# Altium PCB 2015PCB新.PcbDoc
Units mil, origin at the board's own origin, x right, y up, seen from the top; angles counter-clockwise.
Board outline 3610.89 x 3006.48 mil, 2 copper layers (Top Layer, Bottom Layer); 68 components, 37 nets, 203 pads, 79 vias.
Unrouted connection lines stored in the file: 1.
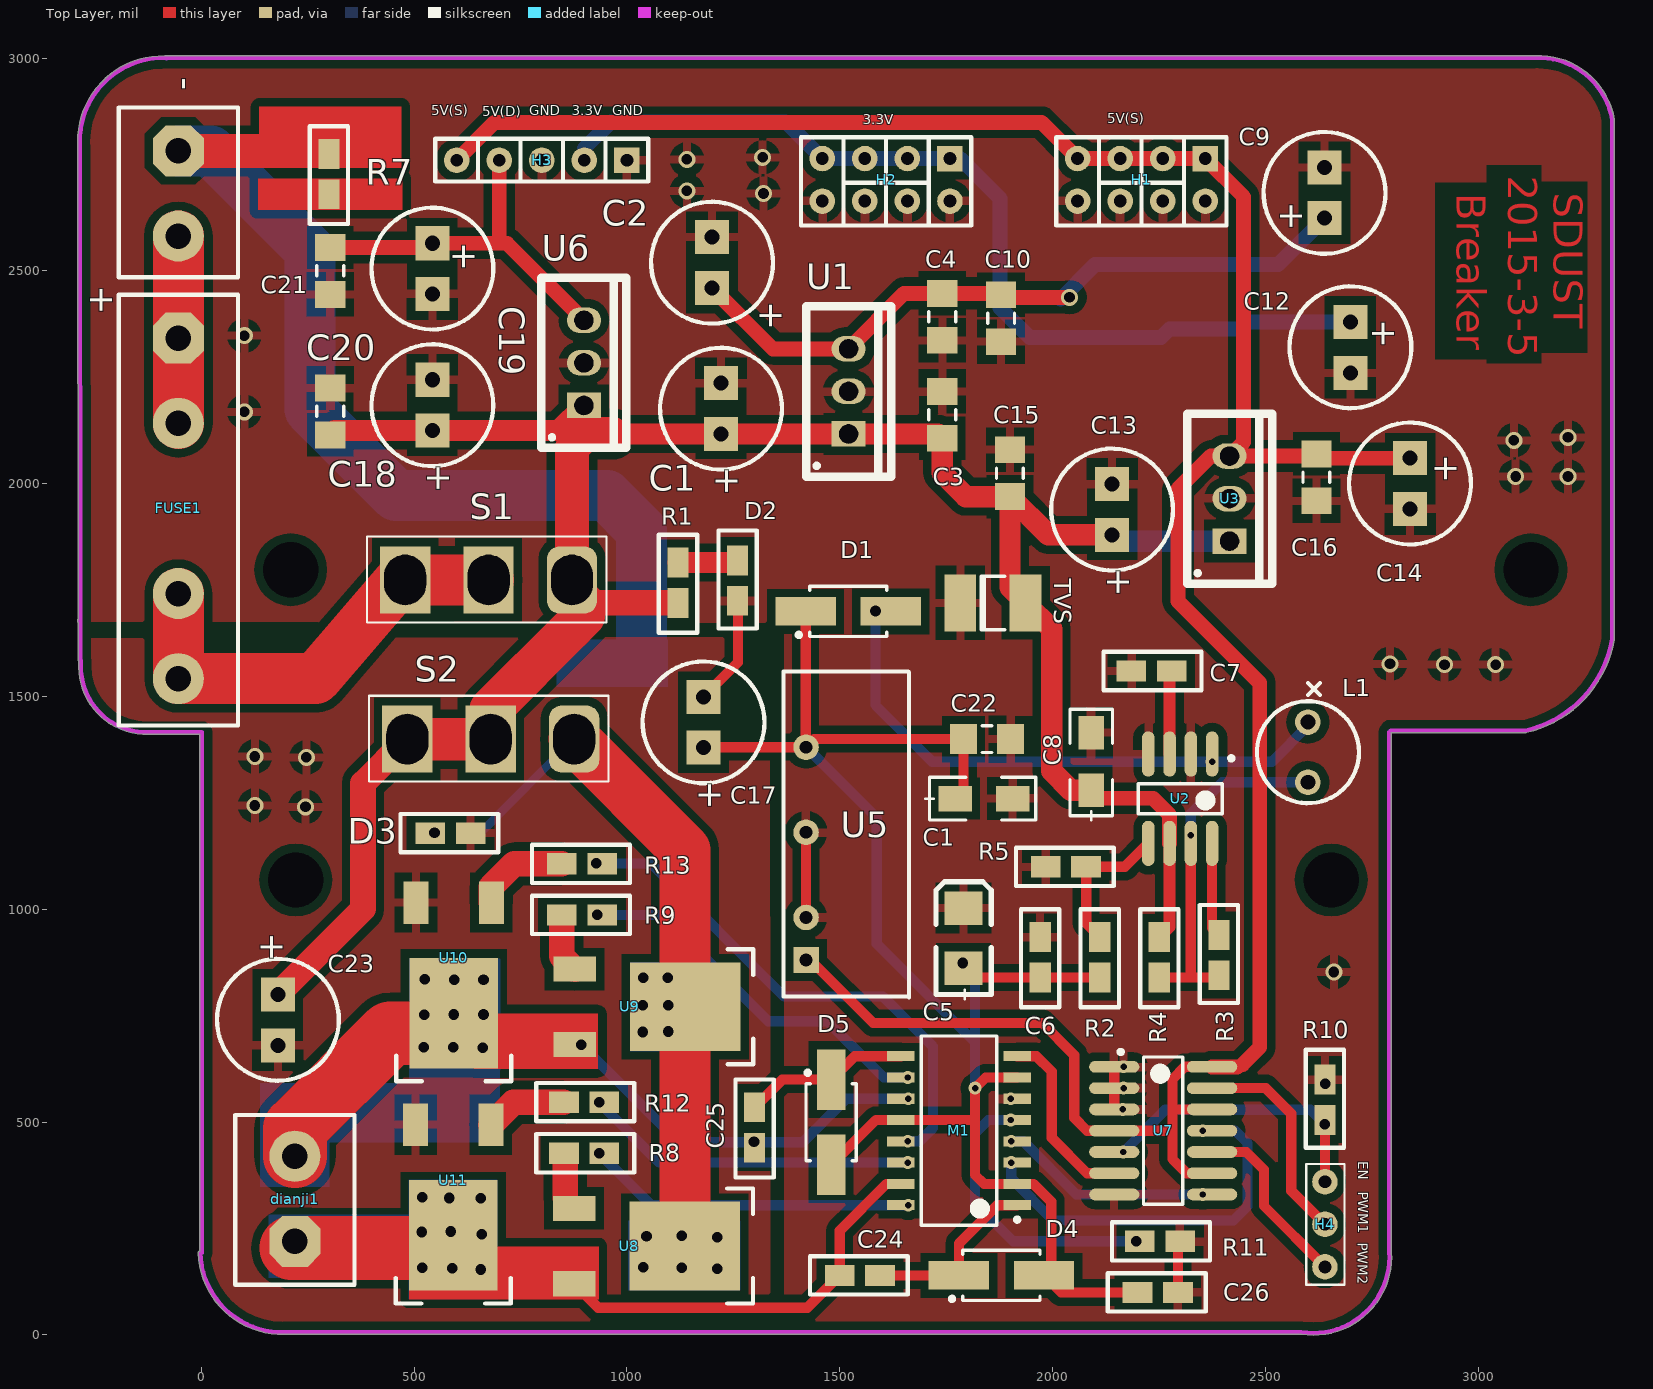
[diagram p0: Top Layer view]
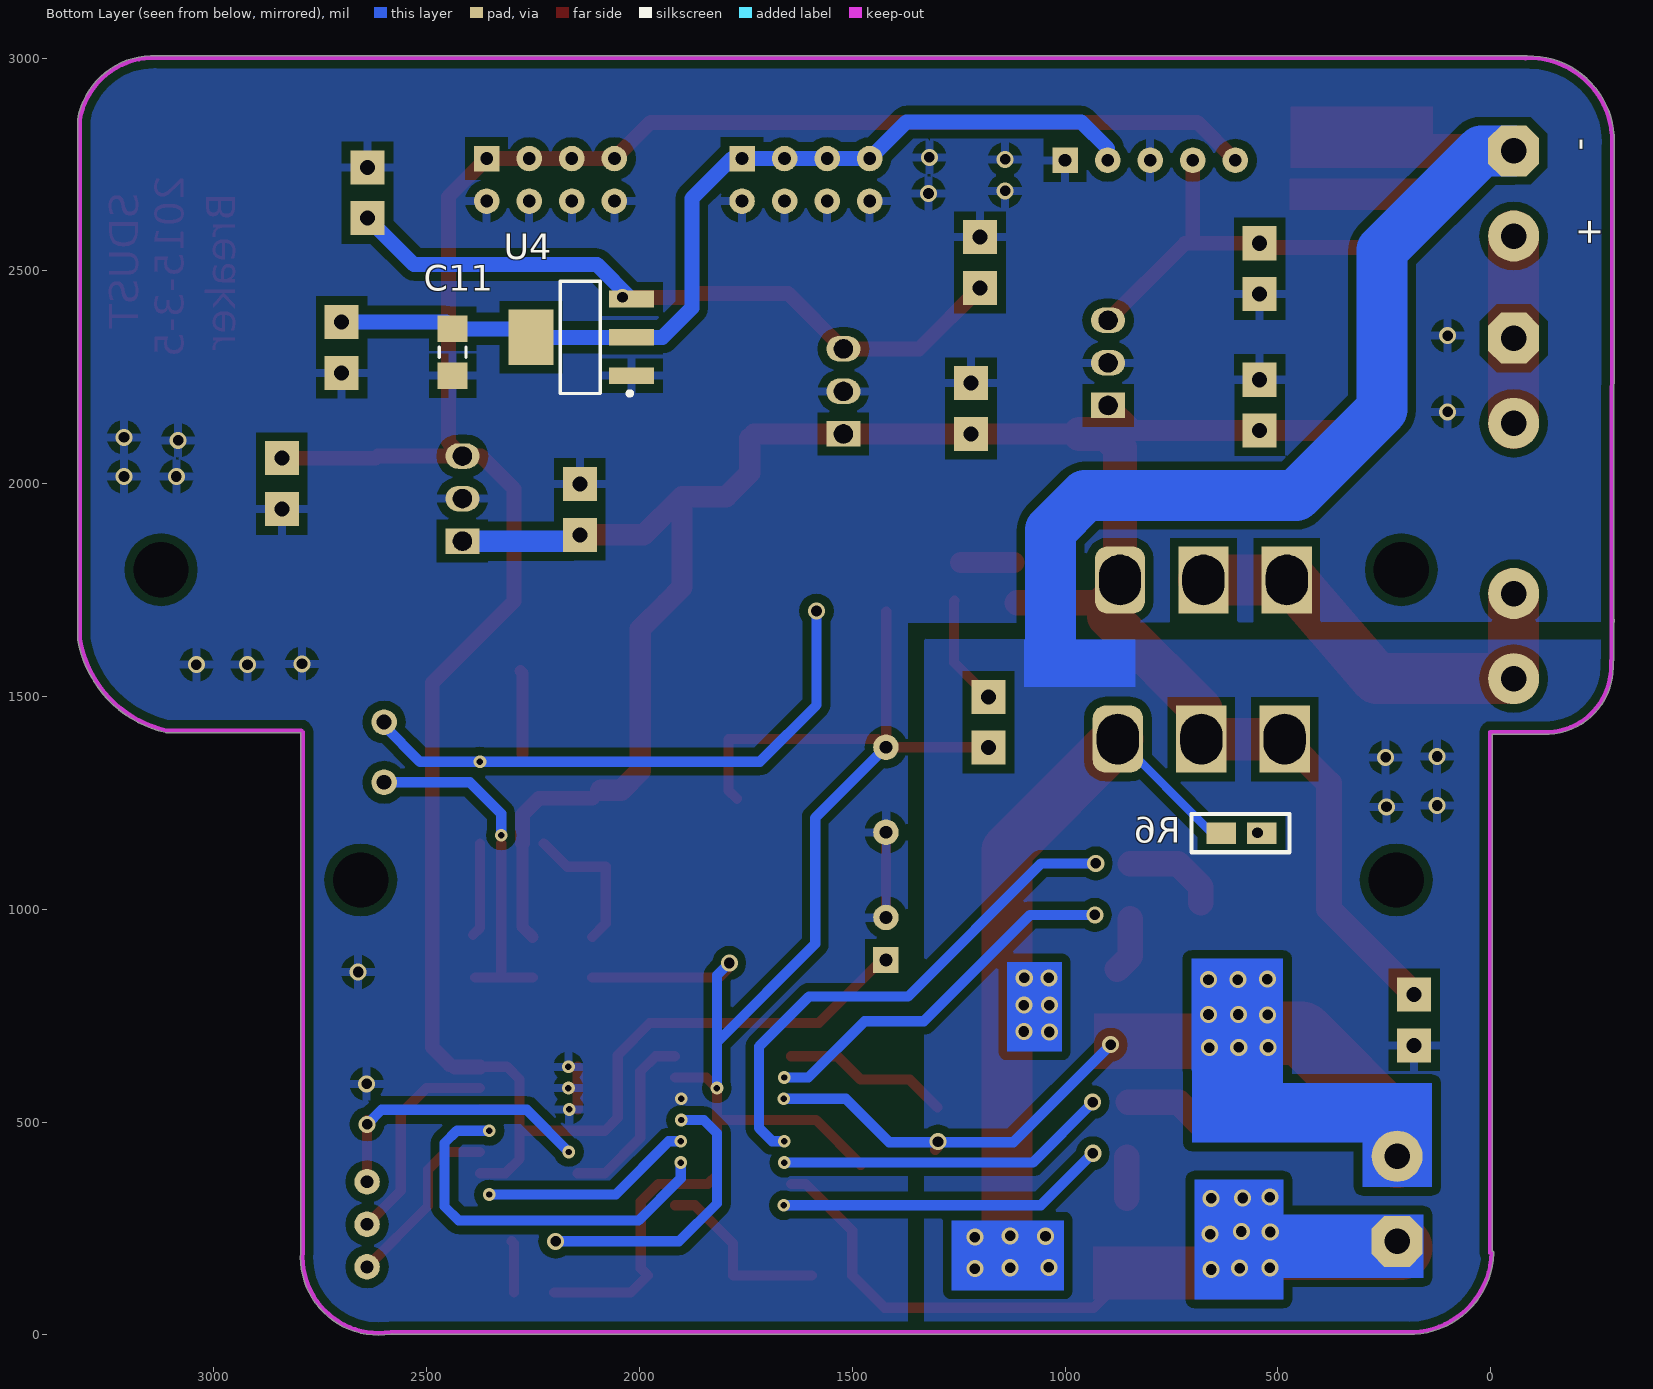
[diagram p1: Bottom Layer view, seen from below]

## Layer stack, top to bottom
Top Layer: signal copper 1.4
Dielectric: dielectric 12.6, FR-4, Dk 4.8
Bottom Layer: signal copper 1.4

## Board outline
-7.61,192.23 cw(c-2.6,192.43) -4.02,197.24 -4.02,1411.99 -133.79,1411.99 cw(c-136.63,1416.12) -136.91,1411.11 cw(c-128.04,1570.81) -287.54,1582.71 cw(c-283.67,1585.9) -288.69,1585.9 -288.69,1673.92 -289.22,1674.45 cw(c-285.67,1678) -288.69,1682 -289.68,2787.16 cw(c-90.06,2804.78) -85.84,3005.14 cw(c-83,3001) -83,3006.02 3133.9,3006.02 cw(c3141.03,2824.27) 3320.14,2855.88 cw(c3315.2,2855.01) 3320.22,2855.01 cw(c3315.2,2855.01) 3320.22,2854.92 3320.22,2855.01 3320.22,2854.92 3319.41,1634.64 cw(c3314.39,1634.58) 3319.41,1634.58 cw(c3314.39,1634.58) 3319.34,1633.74 cw(c3052.9,1679) 3113.12,1415.54 cw(c3112,1420.43) 3112,1415.41 2796.01,1415.41 2796.01,197.19 cw(c2612.54,183.51) 2796.52,183.51 cw(c2612.54,183.51) 2583.85,1.78 cw(c2584.63,6.74) 2581.87,2.55 cw(c2580.08,7.23) 2580.08,2.22 210.73,2.22 cw(c191,200)

## Design rules (kind name [scope] priority, off if disabled: settings)
Clearance Clearance_1 [InPoly] p1: gap=20
Clearance [All] p2: gap=12
ComponentClearance [All] p1: gap=8 collisioncheckmode=3 verticalgap=8 showdistances=FALSE
PolygonConnect [All] p1: connectstyle=Relief reliefconductorwidth=20 reliefentries=4 polygonreliefangle="90 Angle"
RoutingVias [All] p1: holewidth=25 width=40 viastyle="Through Hole" minholewidth=15 minwidth=25 maxholewidth=25 maxwidth=50
SilkscreenOverComponentPads [All] p1: minsilkscreentomaskgap=5
SolderMaskExpansion [All] p1: expansion=4
TestPointUsage [All] p1: valid=0 allowmultiple=FALSE
Testpoint [All] p1: side=15 testpointundercomponent=TRUE minsize=40 maxsize=100 preferedsize=60 minholesize=0 maxholesize=40 preferedholesize=32 testpointgrid=1 style=1023 order=0-112345678
Width [All] p1: maxlimit=1000 minlimit=8 preferedwidth=24
22 further rules are at their usual default settings.

## Components (designator, comment, footprint, x,y, rotation, side; value= is the part's Value field where it differs from the comment)
+ "7.2V电池" PCBComponent_1#1 -54,2782 r0 top (schematic designator BATERY1)
C1 "Cap Pol1_1" PCBComponent_1#2 1221,2117 r180 top
C1 "Comment" 1206 1771,1260 r0 top
C2 "Cap Pol1_1" PCBComponent_1#2 1200,2460 r180 top
C3 "Cap" PCBComponent_1#3 1741,2217 r0 top
C4 "Cap" PCBComponent_1#3 1741,2337 r180 top
C5 "22uF_3528" 3528_B 1791,860 r90 top
C6 "0.1uF" 0805 1971,840 r90 top
C7 "470pF" 0805 2280,1560 r180 top
C8 "10uf" 1206 2091,1280 r90 top
C9 "Cap Pol1_1" PCBComponent_1#2 2639,2624 r180 top
C10 "Cap" PCBComponent_1#3 1879,2444 r0 top
C11 "Cap" PCBComponent_1#3 2439,2364 r180 bottom
C12 "Cap Pol1_1" PCBComponent_1#2 2700,2380 r0 top
C13 "Cap Pol1_1" PCBComponent_1#2 2140,1880 r180 top
C14 "Cap Pol1_1" PCBComponent_1#2 2840,2060 r0 top
C15 "Cap" PCBComponent_1#3 1900,2080 r0 top
C16 "Cap" PCBComponent_1#3 2620,1960 r180 top
C17 "Cap Pol1_1" PCBComponent_1#2 1180,1380 r180 top
C18 "Cap Pol1_1" PCBComponent_1#2 543,2125 r180 top
C19 "Cap Pol1_1" PCBComponent_1#2 543,2565 r0 top
C20 "Cap" PCBComponent_1#3 303,2225 r0 top
C21 "Cap" PCBComponent_1#3 303,2445 r180 top
C22 "Cap" PCBComponent_1#3 1791,1400 r90 top
C23 "Cap Pol1_1" PCBComponent_1#2 180,800 r0 top
C24 "4.7uF" 0805 1500,140 r0 top
C25 "4.7uF" 0805 1300,440 r90 top
C26 "0.1uF" 0805 2200,100 r0 top
D1 "1N5819" SS14_SMA 1520,1700 r180 top
D2 "LED_0805" 0805 1260,1820 r270 top
D3 "LED_0805" 0805 538,1179 r0 top
D4 "1N5819" SS14_SMA 1880,140 r180 top
D5 "1N5819" SS14_SMA 1480,500 r90 top
dianji1 "dianji" PCBComponent_1#1 220,220 r180 top
FUSE1 "Header 2X2" PCBComponent_1#4 -54,2342 r0 top
H1 "HEADER4X2" HEADER4X2 2359,2764 r180 top
H2 "HEADER4X2" HEADER4X2 1759,2764 r180 top
H3 "HEADER" HEADER5 1000,2760 r180 top
H4 "HEADER" 干簧管 2640,160 r90 top
L1 "Inductor" PCBComponent_1#5 2600,1440 r270 top
M1 "HIP4082" SO-16 1780,480 r90 top
R1 "RES" 0805 1120,1720 r90 top
R2 "10K" 0805 2111,840 r90 top
R3 "180" 0805 2391,940 r270 top
R4 "0.22" 0805 2251,840 r90 top
R5 "1K" 0805 1984,1100 r0 top
R6 "RES" 0805 633,1179 r180 bottom
R7 "RES" 0805 300,2680 r90 top
R8 "10" 0805 947,427 r180 top
R9 "10" 0805 847,987 r0 top
R10 "10K" 0805 2640,600 r270 top
R11 "10" 0805 2300,220 r180 top
R12 "10" 0805 947,547 r180 top
R13 "10" 0805 847,1107 r0 top
S1 "单刀双掷开关" 三脚开关 675,1774 r0 top
S2 "三脚开关" 三脚开关 680,1400 r0 top
TVS "TVS" 1812 1860,1720 r0 top (schematic designator erjiguan1)
U1 "LM2940" PCBComponent_1#6 1521,2117 r0 top
U2 "MC34063_sop" SOP-8 2300,1260 r270 top
U3 "LM2940" PCBComponent_1#6 2416,1865 r0 top
U4 "AMS1117" SOT223_forAMS1117 2139,2344 r0 bottom
U5 "0512" "PCBComponent_1 - duplicate" 1420,880 r90 top
U6 "LM2940" PCBComponent_1#6 899,2184 r0 top
U7 "74HC08D_sop" SOP-14 2260,480 r0 top
U8 "LR7843" DPAK 1136,209 r270 top
U9 "LR7843" DPAK 1137,771 r270 top
U10 "LR7843" DPAK 593,756 r180 top
U11 "LR7843" DPAK 592,234 r180 top

## Footprints (in the part's own frame and the unit in brackets; to place one, negate y for a bottom-side part, rotate by r counter-clockwise, add the part's x,y. Pads: shape width x height; smd on the part's side, far side on the other; paste and mask are expansions set on the pad)
0805 [mil]
  rect 70x50 smd: 1(0,0) 2(95,0)
  silkscreen extent -70,-45 160,45
1206 [mil]
  rect 78.74x60 smd: 1(0,0) 2(135,0)
  silkscreen extent -70,-50 190,50
1812 [mm] "Chip Capacitor; Body 4.5 x 3.2 mm (LxW typ)"
  rect 1.9x3.4 smd: 1(-1.95,0) 2(1.95,0)
  silkscreen extent -0.7,-1.6 0.7,1.6
3528_B [mil]
  rect 78.74x90 smd: 1(2,0) 2(143,0)
  silkscreen extent -71,-65 205,65
DPAK [mil]
  rect 59.06x100 smd: 1(-88.5,-260) 3(88.5,-260)
  rect 208.66x260 smd: 2(0,0)
  silkscreen extent -135,100 135,160
HEADER4X2 [mil]
  rect 60x60 hole 30: 1(0,0)
  round 60 hole 30: 2(100,0) 3(200,0) 4(300,0) 5(300,100) 6(200,100) 7(100,100) 8(0,100)
  silkscreen extent -50,-50 350,157
HEADER5 [mil]
  rect 60x60 hole 30: 1(0,0)
  round 60 hole 30: 2(100,0) 3(200,0) 4(300,0) 5(400,0)
  silkscreen extent -50,-50 450,50
PCBComponent_1#1 [mil]
  oct 120x120 hole 60: 1(0,0)
  round 120 hole 60: 2(0,-200)
  silkscreen extent -140,-297 140,102
PCBComponent_1#2 [mil]
  rect 80x80 hole 35.42: 1(0,0) 2(0,-119.37)
  silkscreen extent -143,-203 143,84
PCBComponent_1#3 [mil]
  rect 70.87x62.99 smd: 1(0,0) 2(0,-110.24)
  silkscreen extent -31,-67 31,-43
PCBComponent_1#4 [mil]
  oct 120x120 hole 60: 1(0,0)
  round 120 hole 60: 2(0,-600) 3(0,-200) 4(0,-800)
  silkscreen extent -140,-910 140,102
PCBComponent_1#5 [mil]
  round 60 hole 35: 1(0,0) 2(141.42,0)
  silkscreen extent -92,-120 191,120
PCBComponent_1#6 [mil]
  rect 80x60 hole 45: 1(0,0)
  oval 80x60 hole 45: 2(0,100) 3(0,200)
  silkscreen extent -100,-100 100,300
"PCBComponent_1 - duplicate" [mil]
  rect 60x60 hole 30: 1(1,-1)
  round 60 hole 30: 2(101,-1) 3(301,-1) 4(501,-1)
  silkscreen extent -87,-243 679,52
SO-16 [mm] "Small Outline; 16 Leads; Body Width 5.6 mm; Pitch 1.27 mm"
  rect 0.6x1.65 smd: 1(-4.445,-3.475) 2(-3.175,-3.475) 3(-1.905,-3.475) 4(-0.635,-3.475) 5(0.635,-3.475) 6(1.905,-3.475) 7(3.175,-3.475) 8(4.445,-3.475) 9(4.445,3.475) 10(3.175,3.475) 11(1.905,3.475) 12(0.635,3.475) 13(-0.635,3.475) 14(-1.905,3.475) 15(-3.175,3.475) 16(-4.445,3.475)
  silkscreen extent -5.65,-3.6 5.65,2.25
SOP-8 [mm] "SOIC, 8-Leads, Body 5.0x4.0mm (max), Pitch 1.27mm, IPC Medium Density"
  oval 2.7x0.75 smd: 1(-2.667,1.905) 2(-2.667,0.635) 3(-2.667,-0.635) 4(-2.667,-1.905) 5(2.667,-1.905) 6(2.667,-0.635) 7(2.667,0.635) 8(2.667,1.905)
  silkscreen extent -2.54,-2.5 0.9,3.17, body extent -2,-2.5 2,2.5, height 1.75
SOP-14 [mm] "SOIC, 14-Leads, Body 8.8x4.0mm (max), Pitch 1.27mm, IPC Medium Density"
  oval 3x0.7 smd: 1(-2.921,3.81) 2(-2.921,2.54) 3(-2.921,1.27) 4(-2.921,0) 5(-2.921,-1.27) 6(-2.921,-2.54) 7(-2.921,-3.81) 8(2.921,-3.81) 9(2.921,-2.54) 10(2.921,-1.27) 11(2.921,0) 12(2.921,1.27) 13(2.921,2.54) 14(2.921,3.81)
  silkscreen extent -2.66,-4.4 1.18,4.82, body extent -2,-4.38 2,4.38, height 1.75
SOT223_forAMS1117 [mm] "SOT223, 4-Leads, Body 6.7x7.3mm (max), Pitch 2.30mm, IPC Low Density"
  rect 2.7x1 smd: 1(-3.048,2.286) 2(-3.048,0) 3(-3.048,-2.286)
  rect 2.7x3.3 smd: 2(2.95,0)
  silkscreen extent -3.07,-3.35 1.2,3.47, body extent -1.85,-3.35 1.85,3.35, height 1.8
SS14_SMA [mm] "Molded Diode, 2-Leads, Body 4.3x2.6mm, IPC Low Density"
  rect 3.6x1.7 smd: 1(-2.54,0) 2(2.54,0)
  silkscreen extent -2.3,-1.5 3.07,1.52, body extent -2.29,-1.5 2.28,1.5, height 2.62
三脚开关 [mm]
  rect 3x4 hole 2.5 slot 3 at 90 deg: 1(-4.978,0) 2(0,0)
  rrect50% 3x4 hole 2.5 slot 3 at 90 deg: 3(4.978,0)
  silkscreen extent -7.26,-2.54 7.04,2.59
干簧管 [mil]
  round 60 hole 30: 1(0,0) 2(100,0) 3(200,0)
  silkscreen extent -42,-46 242,44

## Part data
+ dianji1: library part "Header 2", "Header, 2-Pin"
C1 C2 C9 C12 C13 C14 C17 C18 C19 C23: "Polarized Capacitor (Radial)"
C3 C4 C10 C11 C15 C16 C20 C21 C22: "Capacitor"
C5: library part 10uF_3528
C6 C7 C24 C25 C26: library part 0.1uF_0805
C8: library part ELECTRO2_2, "Electrolytic Capacitor"
D1 D4 D5: library part 1N5819_SMA
FUSE1: "Header, 2-Pin, Dual row"
H3: library part HEADER5, "CCD接口"
H4: library part HEADER3
R1 R6 R7: library part 0805-电阻
R2 R3 R4 R5 R8 R9 R10 R11 R12 R13: library part RES_0805
TVS: library part Component_1
U7: library part 74HCT00D_sop
U8 U9 U10 U11: library part IRF3205_D2PAK

## Free pads (board coordinates)
  round 60 hole 129.92: 1(222,1069) 2(2655,1069) 3(210,1798) 4(3124,1798)

## Via types
v1: diameter 40, hole 25, Top Layer to Bottom Layer, 61 vias
v2: diameter 30, hole 15, Top Layer to Bottom Layer, 18 vias

## Nets (pads, with @x,y where several pads share a name; then routed paths per layer and width w, separated by ;. In a path a pad name is that pad's centre, name@x,y a point inside that pad or via, vN(x,y) a via of type N, cw(c..) or ccw(c..) an arc to the next point about the centre after c; other vN are vias at no path point)
3.3V: C11.1 C12.1 H2.1 H2.2 H2.3 H2.4 H3.2 U4.2 | length 2262.7
  Bottom Layer w35: H3.2 900,2788 962,2850 1373,2850 H2.4 H2.3 H2.2 H2.1 1783,2764 1877,2670 1877,2413 1946,2344 U4.2@2019,2344 ; U4.2@1985,2344 U4.2@2019,2344 ; C12.1 2455,2380 C11.1 2275.14,2364 2255.14,2344 U4.2@2019,2344
5V(3): C2.1 C4.2 C9.1 C10.1 U1.3 U4.3 | length 1651.1
  Top Layer w35: C2.1 1343,2317 U1.3 1651.24,2447.24 C4.2 C10.1@1875.76,2447.24 ; C10.1 1885,2438 v1(2040,2438)
  Bottom Layer w35: U4.3 2100,2515 2530,2515 C9.1
5V(D): C19.1 C21.2 H3.4 U6.3 | length 870.8
  Top Layer w35: C21.2 533.24,2555.24 C19.1 698,2565 ; H3.4 700,2567 698,2565 ; U6.3 718,2565 698,2565
5V(S): C14.1 C16.2 H1.1 H1.2 H1.3 H1.4 H3.5 U3.3 U5.1 U7.4 U7.9 U7.12 U7.14 | length 6274.2
  Top Layer w24: U5.1 1431,881 1579,733 1975.65,733 2051,657.65 2051,510 2081,480 U7.4 2281,480 2282,481 ; U7.9 2315.26,380 2282,413.26 2282,481 ; U7.12 2287,530 2282,535 ; U7.14 2311,630 2282,601 2282,535 ; C16.2@2614.76,2065 C16.2@2619.76,2060 ; 2282,481 2282,535
  Top Layer w35: H3.5 689,2849 1974,2849 H1.4 H1.3 H1.2 H1.1 2449,2674 2449,2098 U3.3 C16.2@2614.76,2065 ; U7.14 U7.14@2434,630 ; U3.3@2413,2065 2372,2065 2295,1988 2295,1724 2487,1532 2487,676 2445.95,634.95 ; C16.2@2619.76,2060 C14.1
7.2V: C1.1@1221,2117 C3.2 C8.1 C13.1 C15.2 C18.1 C20.2 C23.1 R1.1 R4.2 S1.3 S2.1 S2.2 TVS.2 U1.1 U2.6 U3.1 U6.1 | length 5539.9
  Top Layer w28: C8.1 C8.1@2110,1261 ; R4.2 2275,959 U2.6
  Top Layer w35: C20.2 C20.2@313.24,2125 ; C3.2@1730.76,2117 C3.2 ; C8.1@2110,1261 2236,1261 2275,1222 U2.6
  Top Layer w50: C20.2@313.24,2125 C18.1 840,2125 U6.1 ; 966,2117 1221,2117 U1.1 C3.2@1730.76,2117 ; C3.2 1741,2025 1796.24,1969.76 C15.2 ; C8.1 2043,1280 1998,1325 1998,1658.77 TVS.2 1900,1756.77 C15.2 ; C13.1 1989.76,1880 C15.2
  Top Layer w60: C23.1@180,801 380,1001 380,1296 S2.1 ; S1.3@899,1746 925,1720 R1.1@1112,1720
  Top Layer w80: S1.3@863,1742 S1.3@899,1706 ; S1.3 871,2084 904,2117 966,2117
  Top Layer w100: S2.1 S2.2 680,1470 871,1661 899,1689 S1.3@899,1706
  Bottom Layer w35: C13.1 C13.1@2155,1865
  Bottom Layer w50: C13.1@2155,1865 U3.1
12V: C1.1@1771,1260 C5.1 C6.1 C17.1 C22.1 C26.1 D1.2 D4.1 D5.1 M1.2 M1.7 M1.12 R2.1 U5.4 | length 3895.9
  Top Layer w24: C17.1 1181,1381 U5.4 ; D1.2 1420,1382 U5.4 ; D5.1 1585,505 M1.12 1818,505 ; C1.1@1771,1260 1791,1280 C22.1 1440,1400 U5.4 ; C5.1 1813,840 C6.1 R2.1 ; M1.7 1843,605 v2(1818,580) 1818,505 ; C26.1 2020,100 D4.1 1997,157 1997,313 1955,355 M1.2 1839,355 1818,376 1818,505
  Bottom Layer w24: U5.4 1587,1215 1587,919 1818,688 ; v1(1789,874) 1818,845 1818,688 ; v2(1818,580) 1818,688
EN: H4.3 R10.2 U7.5 | length 674.1
  Top Layer w24: H4.3 R10.2
  Bottom Layer w24: v2(2166,430) 2265,529 2606,529 v1(2640,495)
ENABLE: M1.8 U7.6 | length 433.5
  Top Layer w24: M1.8 1962,655 1998,619 1998,463 2081,380 U7.6
GND: C1.2 C2.2 C3.1 C4.1 C5.2 C6.2 C7.2 C8.2 C9.2 C10.2 C11.2 C12.2 C13.2 C14.2 C15.1 C16.1 C17.2 C18.2 C19.2 C20.1 C21.1 C22.2 C26.2 D2.2 H1.5 H1.6 H1.7 H1.8 H2.5 H2.6 H2.7 H2.8 H3.1 H3.3 M1.6 R5.1 R7.1 R10.1 R11.1 TVS.1 U1.2 U2.2 U2.4 U3.2 U4.1 U5.2 U5.3 U6.2 U7.1 U7.2 U7.3 U7.7 | length 681.7
  Top Layer w24: C17.2 1261,1580.37 1261,1724 D2.2 ; U5.2 U5.3 ; U7.3 U7.2 U7.1 ; C26.2 2295,215 R11.1
  other v1: 2641,590 2661,853 2921,1575 3041,1575 2793,1577 3088,2017 3211,2017 3084,2102 3211,2109 101,2169 101,2348 1321,2682 1141,2688 1141,2762 1319,2767
  other v2: 2165,530 1902,555 2167,580 2167,630
NetBATERY1_2: +.2 FUSE1.1 FUSE1.3 | length 440
  Top Layer w120: FUSE1.3 FUSE1.1 +.2
NetC7_1: C7.1 U2.3 | length 197.1
  Top Layer w28: U2.3 2275,1555 C7.1
NetC24_1: C24.1 dianji1.1 M1.15 U8.3 U11.2 | length 1365.1
  Top Layer w24: U8.3 932.5,64 1424,64 C24.1 1500,245 1610,355 M1.15
  Top Layer w100: U11.2@562,204 U11.2
  Top Layer w150: dianji1.1@212,204 U11.2@562,204
  other v1: 657,154 590,157 519,158 659,237 518,242 586,243 657,321 583,322 519,324
NetC24_2: C24.2 D4.2 M1.1 | length 433.9
  Top Layer w24: C24.2 D4.2 1780,214.74 1870.26,305 M1.1
NetC25_1: C25.1 dianji1.2 M1.11 U9.3 U10.2 | length 1776.9
  Top Layer w24: U10.2@546,709 U10.2 U10.2@666.5,682.5 ; C25.1 C25.1@1305,435
  Top Layer w70: U10.2@666.5,682.5 U9.3
  Top Layer w150: dianji1.2 220,485 444,709 U10.2@546,709
  Bottom Layer w24: v1(893,682) 1122,453 1413.31,453 1515.31,555 v2(1661,555)
  other v1: 1298.69,454.31 661,675 523,676 592,676 524,752 593,753 663,753 594,835 663,835 525,836
NetC25_2: C25.2 D5.2 M1.9 | length 392.9
  Top Layer w24: C25.2 1365,600 D5.2 1535,655 M1.9
NetD1_1: D1.1 L1.1 U2.1 | length 1335.9
  Bottom Layer w24: v1(1584,1701) 1584,1480 1717,1347 v2(2375,1347) 2516,1347 2600,1431 L1.1
NetD2_1: D2.1 R1.2 | length 125
  Top Layer w50: R1.2 D2.1@1245,1815
NetD3_1: D3.1 R6.2
  other v1: 548,1180
NetFUSE1_2: FUSE1.2 FUSE1.4 S1.1 S1.2 | length 1046.3
  Top Layer w120: FUSE1.2 FUSE1.4 268,1542 S1.1@468,1774 ; S1.1 S1.1@468,1774 ; S1.2 S1.1@468,1774
NetL1_2: L1.2 R3.2 R4.1 U2.7 | length 807.7
  Top Layer w24: R4.1 2322,840 ; U2.7 2325,843 2322,840 ; R3.2@2386,840 2322,840
  Bottom Layer w24: v2(2325,1174) 2325,1225 2398.58,1298.58 L1.2
NetM1_5: M1.5 R11.2 | length 677.7
  Bottom Layer w24: v2(1902,505) 1849,505 1818,474 1818,309 1907,220 v1(2197,220)
NetM1_10: M1.10 R9.2 | length 889.6
  Top Layer w20: M1.10@1642.19,606 M1.10
  Bottom Layer w24: v1(930,987) 1082,987 1331.72,737.28 1470.77,737.28 1603.06,605 v2(1660,605)
NetM1_13: M1.13 R13.2 | length 1233
  Bottom Layer w24: v1(928,1108) 1056,1108 1369,795 1602,795 1719,678 1719,486 1688,455 v2(1660,455)
NetM1_14: M1.14 R12.1 | length 784.6
  Bottom Layer w24: v1(935.13,546.87) 934.63,546.37 1076,405 v2(1660,405)
NetM1_16: M1.16 R8.1 | length 776.5
  Bottom Layer w24: v1(935,427) 1057,305 v2(1661,305)
NetR2_2: R2.2 R5.2 U2.5 | length 347
  Top Layer w24: R2.2 2079,967 R5.2 2170,1100 U2.5
NetR3_1: R3.1 U2.8 | length 221.6
  Top Layer w24: U2.8 2375,956 R3.1
NetR6_1: R6.1 S2.3 U8.2 U9.2 | length 1634.1
  Top Layer w120: S2.3 1137,1139 U9.2 1137,210 U8.2
  Bottom Layer w20: R6.1 655,1179 S2.3
  other v1: 1212,156 1129,158 1038,159 1212,230 1046,232 1129,233 1037,712 1097,713 1037,775 1097,775 1038,839 1096,839
NetR8_2: R8.2 U8.1 | length 96.5
  Top Layer w60: U8.1@855,321.5 R8.2@855,418
NetR9_1: R9.1 U9.1 | length 130.9
  Top Layer w60: R9.1@847,978 847,889.5 U9.1
NetR12_2: R12.2 U11.1 | length 193.5
  Top Layer w60: U11.1 733.5,547 R12.2
NetR13_1: R13.1 U10.1 | length 225.2
  Top Layer w60: U10.1 681.5,1053.5 735,1107 R13.1
PGND: +.1 C23.2 D3.2 R7.2 U10.3 U11.3 | length 2635.1
  Top Layer w80: +.1 293,2782 +.1
  Bottom Layer w120: +.1 22,2782 255,2549 255,2175 458,1972 953,1972 1034,1891 1034,1626
  other v1: 245,1241 126,1244 247,1357 126,1359
PWM1: H4.2 U7.13 | length 503.6
  Top Layer w24: U7.13 2501,580 2561,520 2561,339 H4.2
PWM2: H4.1 U7.10 | length 426.6
  Top Layer w24: U7.10 2455,430 2497,388 2497,303 H4.1
PWMIN1: M1.3 U7.11 | length 912.7
  Bottom Layer w24: v2(1903,405) 1903,368 2002,269 2425,269 2458,302 2458,451 2429,480 v2(2353,480)
PWMIN2: M1.4 U7.8 | length 501.8
  Bottom Layer w24: v2(1903,455) 1931,455 2056,330 v2(2353,330)

## Polygon pours and split planes (outlines as drawn)
GND on Top Layer "Top Layer-No Net" (solid): -180,3003 3226,3003 3317,2912 3314.39,1548 3172,1418 2794.43,1420.43 2791,74 2691,5 1370,4 1370,1673 -283.67,1676 -287,2896 -180,3003
PGND on Top Layer "Bottom Layer-No Net" (solid, remove dead copper, pour order 1000): -283.67,1637 1336,1640 1337,7.23 83,7.23 1,132 1,1417 -229,1417 -283.67,1507 -283.67,1637
GND on Top Layer "Bottom Layer-No Net" (hatched 90Degree grid 20 track 8, remove dead copper, pour order 1002): 4930,1575.1 4937.87,1567.23 5095,1567.23 5095,1259 5094,1258 5092,1260 4939,1260 4939,1282 4919,1302 4930,1313 4930,1575.1
GND on Bottom Layer "Bottom Layer-No Net" (solid, remove dead copper, pour order 1003): -283.67,2996 3242,3002 3314.39,2922 3314.39,1540 3181,1422 2794.43,1420.43 2791,83 2686,6 1370,7.23 1370,1673 -283.67,1676 -282,3001
PGND on Bottom Layer "Bottom Layer-No Net" (solid, remove dead copper, pour order 1002): 835,1634 -292,1633 -283.67,1479 -210,1417 1,1417 1,95 121,7.23 1331,7.23 1331,1636 835,1634

## Keep-outs
Keep-Out Layer:
  lines w10: -285.67,1678 -283.67,1676 ; -283.67,1585.9 -283.67,1628.67 -283.67,1676 ; -282.36,1584.59 ccw(c-128.04,1570.81) -136.63,1416.12 ; -135.75,1417 -77.18,1417 1,1417 1,192.43 ; -83,3001 3134,3001 cw(c3141.03,2824.27) 3315.2,2855.01 3314.39,1634.58 cw(c3052.9,1679) 3112,1420.43 2794.43,1420.43 ; -82,3000 ccw(c-90.06,2804.78) -284.67,2787.38 -283.67,1676 ; -2.6,192.43 ccw(c191,200) 210.47,7.23 2580.08,7.23 ; 2584.63,6.74 ccw(c2612.54,183.51) 2791,197 ; 2791,190 2791,1417

## Other copper
Top Layer:
  rectangle net PGND: 136,2742 471,2886
  rectangle net GND: 133,2643 473,2717
  rectangle net NetC24_1: 488,83 934,208
  rectangle net NetC25_1: 640,625 932,755
  text "2015-3-5" at 3047,2724 h118.11 r270
  text "SDUST" at 3154,2684 h118.11 r270
  text "Breaker" at 2926,2682 h118.11 r270
Bottom Layer:
  rectangle net PGND: 835,1523 1096,1634
  rectangle net NetC25_1: 488,621 703,884
  rectangle net NetC25_1: 138,348 301,592
  rectangle net NetC25_1: 488,483 702,645
  rectangle net NetC25_1: 139,452 702,592
  rectangle net NetC24_1: 487,83 696,365
  rectangle net NetC24_1: 158,134 696,283
  rectangle net NetR6_1: 1002,104 1267,269
  rectangle net NetR6_1: 1007,666 1137,876

## Silkscreen, mask and mechanical layers (free items; w line width, h text height)
Top Overlay:
  text "-" at -19,2924 h60 r90
  text "GND" at 966,2858 h40
  text "5V(S)" at 540,2857 h40
  text "GND" at 770,2857 h40
  text "3.3V" at 870,2857 h40
  text "5V(D)" at 660,2855 h40
  text "5V(S)" at 2128,2839 h40
  text "3.3V" at 1554,2837 h40
  text "EN" at 2710,408 h40 r270
  text "PWM1" at 2710,337 h40 r270
  text "PWM2" at 2709,217 h40 r270
Bottom Overlay:
  text "-" at -190,2782 h60 r90
  text "+" at -207,2557 h60 r90

## Dimensions
-83,3001 to 210.47,7.23 on Top Overlay
-83,3001 to -178,1417 on Top Overlay
1,192.43 to 2791,190 on Top Overlay
-283.67,1585.9 to 1,1417 on Top Overlay
3314.39,1634.58 to 2791,1417 on Top Overlay
-77.18,1417 to 210.47,7.23 on Top Overlay

## Text inside footprints (layer, text, board x,y; h text height)
C1: Top Overlay "+" at 1261,1971.37 h59.06 r90
C2: Top Overlay "+" at 1364,2361 h59.06 r90
C9: Top Overlay "+" at 2587,2595 h59.06 r90
C12: Top Overlay "+" at 2751,2387 h59.06 r270
C13: Top Overlay "+" at 2180,1734.37 h59.06 r90
C14: Top Overlay "+" at 2898,2069 h59.06 r270
C17: Top Overlay "+" at 1220,1234.37 h59.06 r90
C18: Top Overlay "+" at 583,1979.37 h59.06 r90
C19: Top Overlay "+" at 591,2567 h59.06 r270
C23: Top Overlay "+" at 140,945.63 h59.06 r270